# Altium PCB QT7_Xplained_Pro.PcbDoc
Units mm, origin at the board's own origin, x right, y up, seen from the top; angles counter-clockwise.
Board outline 106.52 x 32 mm, 2 copper layers (Top Layer, Bottom Layer); 44 components, 32 nets, 134 pads, 32 vias.
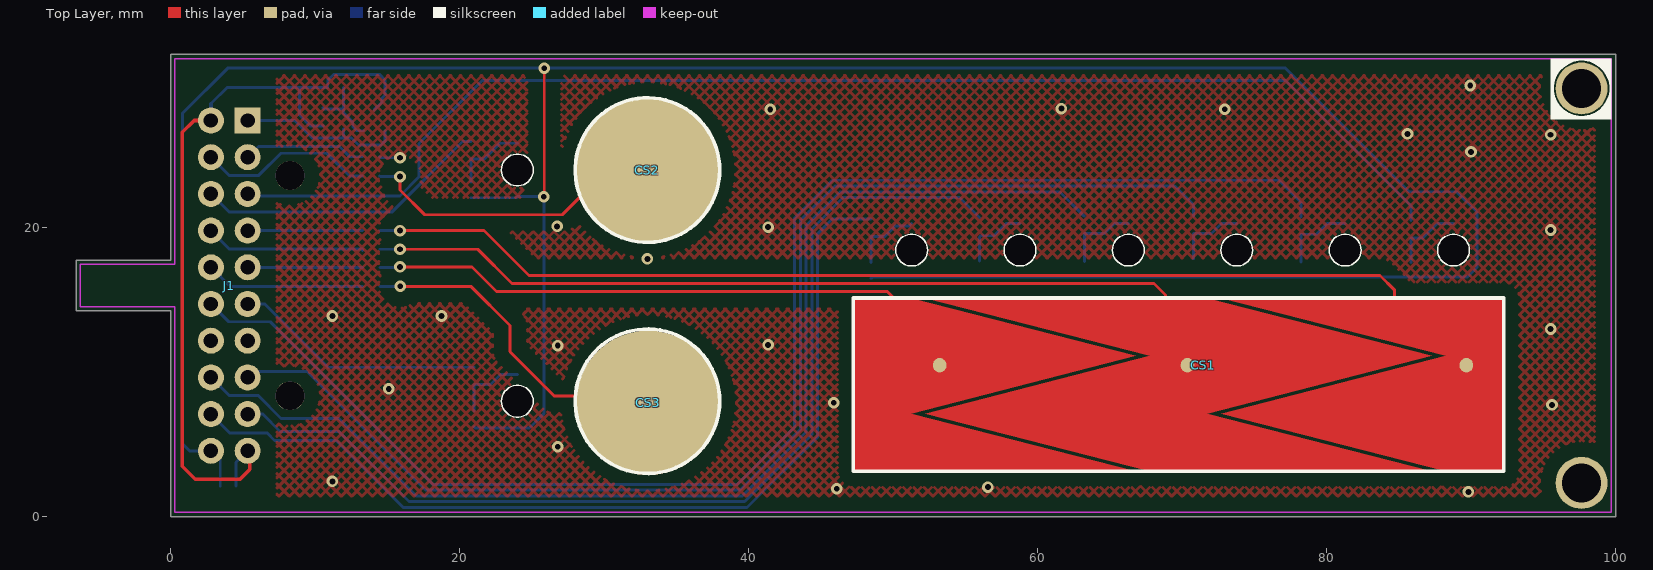
[diagram p0: Top Layer view]
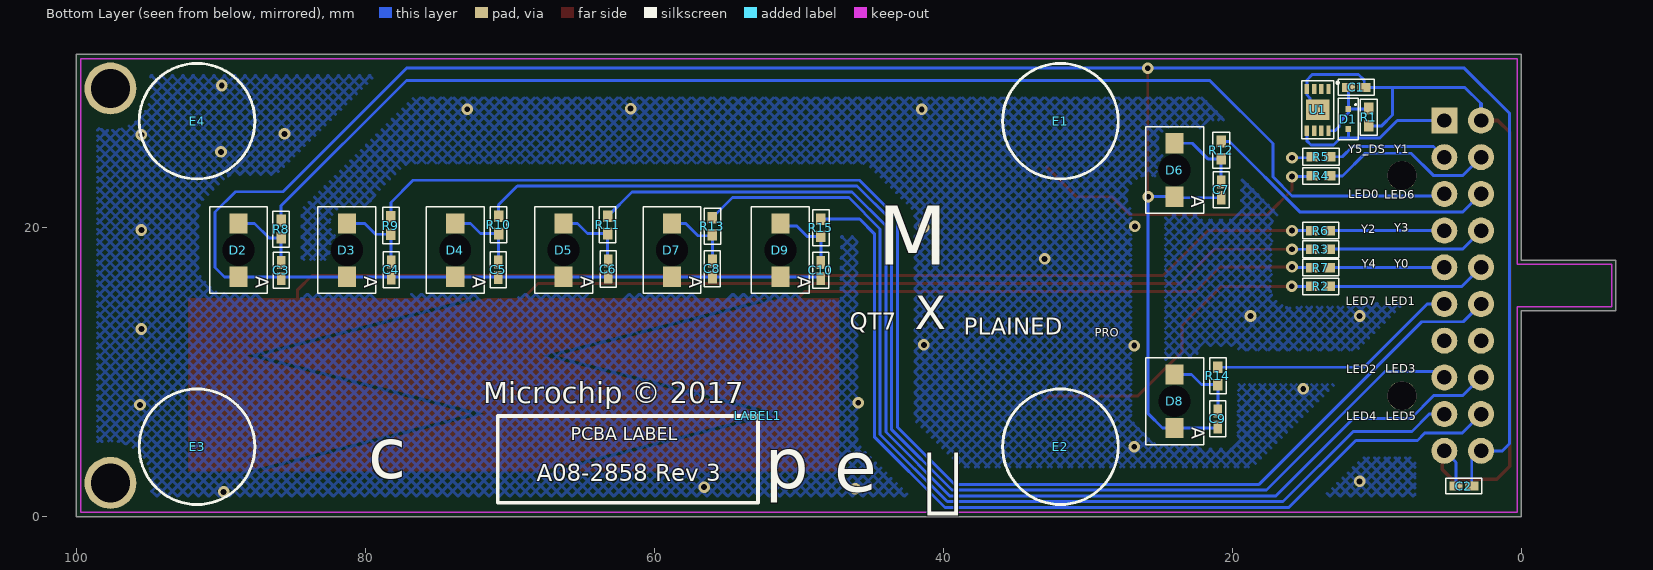
[diagram p1: Bottom Layer view, seen from below]

## Layer stack, top to bottom
Top Solder: solder mask 0.0102, Solder Resist, Dk 3.5
Top Layer: signal copper 0.0356
Dielectric 1: dielectric 0.32, FR-4, Dk 4.8
Bottom Layer: signal copper 0.0356
Bottom Solder: solder mask 0.0102, Solder Resist, Dk 3.5

## Board outline
-6.515,14.248 -6.515,17.748 0,17.748 0,32 100,32 100,0 0,0 0,14.248

## Design rules (kind name [scope] priority, off if disabled: settings)
Clearance Clearance_LED [InComponent('D2')  or   InComponent('D3') or InComponent('D4') or InComponent('D5') or InComponent('D6') or InComponent('D7') or InComponent('D8')or InComponent('D9')] p1: gap=0.05
Clearance Clearance_Poly [InPoly] p2: gap=1
Clearance [All] p3: gap=0.2
HoleSize [All] p1: absolutevalues=TRUE maxlimit=10 minlimit=0.025 maxpercent=80.000 minpercent=20.000
MinimumSolderMaskSliver [All] p1: minsoldermaskwidth=0.1
PlaneConnect [All] p1: planeconnectstyle=Direct reliefexpansion=0.508 reliefentries=4 reliefconductorwidth=0.254 reliefairgap=0.254
PolygonConnect [All] p1: connectstyle=Direct reliefconductorwidth=0.254 reliefentries=4 polygonreliefangle="90 Angle" airgapwidth=0.254
RoutingVias [All] p1: holewidth=0.4 width=0.8 viastyle="Through Hole" minholewidth=0.4 minwidth=0.8 maxholewidth=0.4 maxwidth=0.8
SilkToSilkClearance SilkToSilkClearance_Text [IsText vs IsText] p1: silktosilkclearance=0
SilkToSilkClearance [All] p2: silktosilkclearance=0.1
SilkToSolderMaskClearance [IsPad] p1: minsilkscreentomaskgap=0.1 clearancetoexposedcopper=TRUE
SolderMaskExpansion [All] p1: expansion=0.05
Width [All] p1: maxlimit=0.254 minlimit=0.2 preferedwidth=0.2
25 further rules are at their usual default settings.

## Classes and differential pairs
component class QT7_Xplained_Pro: C1 C2 C3 C4 C5 C6 C7 C8 C9 C10 CS1 CS3 D1 D2 D3 D4 D5 D6 D7 D8 D9 E3 E4 J1 LABEL1 R1 R2 R3 R4 R5 R6 R7 R8 R9 R10 R11 R12 R13 R14 R15 U1

## Components (designator, comment, footprint, x,y, rotation, side; value= is the part's Value field where it differs from the comment)
C1 "Recommended by Escatec. No datasheet available yet." AP1-00001 11.43,29.716 r180 bottom
C2 "Recommended by Escatec. No datasheet available yet." AP1-00001 3.988,2.132 r0 bottom
C3 "CAP-NONPOL" AP1-00001 85.835,17.057 r90 bottom
C4 "CAP-NONPOL" AP1-00001 78.224,17.092 r90 bottom
C5 "CAP-NONPOL" AP1-00001 70.8,17.098 r90 bottom
C6 "CAP-NONPOL" AP1-00001 63.2,17.148 r90 bottom
C7 "CAP-NONPOL" AP1-00001 20.777,22.631 r90 bottom
C8 "CAP-NONPOL" AP1-00001 55.985,17.157 r90 bottom
C9 "CAP-NONPOL" AP1-00001 21.006,6.782 r90 bottom
C10 "CAP-NONPOL" AP1-00001 48.485,17.057 r90 bottom
CS1 "Medium QTouch Slider" Selfcap_Slider 71.45,10.49 r0 top
CS2 "QTouch Button" PCBComponent_1#1 33,24 r0 top
CS3 "QTouch Button" PCBComponent_1#2 33,8 r0 top
D1 "Farnell# 1615809" AP4-00036 11.979,27.531 r270 bottom
D2 "LED_21" AP4-00034 88.785,18.457 r270 bottom
D3 "LED_21" AP4-00034 81.285,18.457 r270 bottom
D4 "LED_21" AP4-00034 73.785,18.457 r270 bottom
D5 "LED_21" AP4-00034 66.285,18.457 r270 bottom
D6 "LED_21" AP4-00034 24,24 r270 bottom
D7 "LED_21" AP4-00034 58.785,18.457 r270 bottom
D8 "LED_21" AP4-00034 24,8 r270 bottom
D9 "LED_21" AP4-00034 51.285,18.457 r270 bottom
E1 "" AP8-00192 31.902,27.38 r0 bottom
E2 "" AP8-00192 31.902,4.85 r0 bottom
E3 "" AP8-00192 91.655,4.85 r0 bottom
E4 "" AP8-00192 91.655,27.38 r0 bottom
J1 "" AP8-00621 4.064,15.998 r90 top locked
LABEL1 "" AP8-00317 52.836,6.98 r0 bottom
R1 "R2" AP2-00000 10.566,27.659 r90 bottom
R2 "R2" AP2-00000 13.894,15.951 r180 bottom
R3 "R2" AP2-00000 13.894,18.515 r180 bottom
R4 "R2" AP2-00000 13.868,23.595 r180 bottom
R5 "R2" AP2-00000 13.868,24.915 r180 bottom
R6 "R2" AP2-00000 13.894,19.81 r180 bottom
R7 "R2" AP2-00000 13.894,17.245 r180 bottom
R8 "R2" AP2-00000 85.835,19.907 r270 bottom
R9 "R2" AP2-00000 78.235,20.157 r270 bottom
R10 "R2" AP2-00000 70.785,20.207 r270 bottom
R11 "R2" AP2-00000 63.235,20.207 r270 bottom
R12 "R2" AP2-00000 20.777,25.375 r270 bottom
R13 "R2" AP2-00000 55.985,20.107 r270 bottom
R14 "R2" AP2-00000 21.006,9.754 r270 bottom
R15 "R2" AP2-00000 48.485,20.007 r270 bottom
U1 "ATSHA204A-SWI" AP6-00409 14.097,28.167 r270 bottom

## Footprints (in the part's own frame and the unit in brackets; to place one, negate y for a bottom-side part, rotate by r counter-clockwise, add the part's x,y. Pads: shape width x height; smd on the part's side, far side on the other; paste and mask are expansions set on the pad)
AP1-00001 [mm] "Standard 0402 SMD capacitor footprint"
  rect 0.9x0.6 smd: 1(-0.55,0) 2(0.55,0)
  silkscreen extent -1.25,-0.55 1.25,0.55, body extent -0.5,-0.3 0.5,0.3, height 0.2
AP2-00000 [mm] "Standard 0402 SMD resistor footprint"
  rect 0.8x0.65 smd: 1(-0.6,0) 2(0.6,0)
  silkscreen extent -1.25,-0.58 1.25,0.58, body extent -0.5,-0.3 0.5,0.3, height 0.2
AP4-00034 [mm] "Reverse mount SMD LED"
  round 0 hole 2.2 unplated mask+1.15: 0(0,0)
  rect 1.4x1.25 smd: 1(1.85,0) 2(-1.85,0)
  silkscreen extent -3,-2 3,2, body extent -2,-1 2,1, height 0.3
AP4-00036 [mm] "Molded Diode, 2-Leads, Body 1,2x0,8mm, IPC Medium Density"
  rect 0.4x0.4 smd: 1(-0.7,0) 2(0.7,0)
  silkscreen extent -1.43,-0.7 1.43,0.7, body extent -0.8,-0.4 0.8,0.4, height 0.7
AP6-00409 [mm]
  rect 0.7x0.3 smd mask+0.075: 1(-1.45,0.75) 2(-1.45,0.25) 3(-1.45,-0.25) 4(-1.45,-0.75) 5(1.45,-0.75) 6(1.45,-0.25) 7(1.45,0.25) 8(1.45,0.75)
  rect 1.4x1.6 smd paste-0.025 mask+0.075: 9(0,0)
  silkscreen extent -2,-1.1 2,1.45, body extent -1.55,-1.05 1.55,1.05, height 0.6
AP8-00192 [mm]
  silkscreen extent -4,-4 4,4, body extent -4,-4 4,4, height 2.79
AP8-00317 [mm] "Placement area for 18x6mm sticker"
  silkscreen extent 0,0 18,6
AP8-00621 [mm] "2x5 Receptacle THM, Right Angle. No Guide. 2.54mm pitch. Length 13.2mm, width 5.0mm, height 5mm"
  rect 1.8x1.8 hole 1: 1(11.43,-1.27)
  rect 2.1x2.1 on Top Paste: 1(11.43,-1.27) 2(11.43,1.27) 3(8.89,-1.27) 4(8.89,1.27) 5(6.35,-1.27) 6(6.35,1.27) 7(3.81,-1.27) 8(3.81,1.27) 9(1.27,-1.27) 10(1.27,1.27) 11(-1.27,-1.27) 12(-1.27,1.27) 13(-3.81,-1.27) 14(-3.81,1.27) 15(-6.35,-1.27) 16(-6.35,1.27) 17(-8.89,-1.27) 18(-8.89,1.27) 19(-11.43,-1.27) 20(-11.43,1.27)
  round 1.8 hole 1: 2(11.43,1.27) 3(8.89,-1.27) 4(8.89,1.27) 5(6.35,-1.27) 6(6.35,1.27) 7(3.81,-1.27) 8(3.81,1.27) 9(1.27,-1.27) 10(1.27,1.27) 11(-1.27,-1.27) 12(-1.27,1.27) 13(-3.81,-1.27) 14(-3.81,1.27) 15(-6.35,-1.27) 16(-6.35,1.27) 17(-8.89,-1.27) 18(-8.89,1.27) 19(-11.43,-1.27) 20(-11.43,1.27)
  body extent -12.95,-1.47 12.95,11.3, height 4.98
PCBComponent_1#1 [mm]
  round 10 smd: 1(0,0)
  silkscreen extent -5,-5 5,5
PCBComponent_1#2 [mm]
  round 10 smd: 1(0.05,-0.1)
  silkscreen extent -5,-5 5,5
Selfcap_Slider [mm] "Selfcap_Slider without wrapround"
  oval 0.95x1 smd: 1(-18.224,0) 2(-1.079,0) 3(18.224,0)
  Top Layer region: 16.941,-7.352 16.801,-7.352 1.259,-3.352 16.801,0.648 1.259,4.648 16.802,4.648 20.801,4.648 20.801,-7.352
  Top Layer region: -20.338,4.648 -20.199,4.648 -4.657,0.648 -20.199,-3.352 -4.657,-7.352 -20.199,-7.352 -24.198,-7.352 -24.199,4.648
  Top Layer region: -3.699,-6.975 -3.699,-7.352 -19.241,-3.352 -3.699,0.648 -19.241,4.648 -3.699,4.648 -3.699,0.648
  Top Layer region: 0.302,4.271 0.302,4.648 15.843,0.648 0.302,-3.352 15.843,-7.352 0.301,-7.352 0.301,-3.352
  Top Layer region: -3.699,4.648 0.301,4.648 0.301,-1.352 0.301,-7.352 -3.699,-7.352

## Part data
C1 C2: library part A01-0347, "Ceramic capacitor, SMD 0402, X5R, 6.3V, +/-20% (de33687)"
C3 C4 C5 C6 C7 C8 C9 C10: library part A01-0038, "Ceramic capacitor, SMD 0402, X7R, 50V, +/-10%"
CS1: library part MediumQTouchSlider
CS2 CS3: library part QTouchButton
D1: library part A04-0049, "Schottky diode, If:200mA, Vf:0.35V, Vrrm:30V, SOD-523"
D2 D3 D4 D5 D6 D7 D8 D9: library part A10-0148, "Reverse mount SMD White LED 180-450mcd@20mA"
E1 E2 E3 E4: library part A08-0053, "2.8mm adhesive feet,diam 8.0mm"
J1: library part A08-1512, "2x10, female pin header receptable, right-angled, 2.54mm pitch, THM, Pin In Paste"
LABEL1: library part A09-0611, "PCBA identification label PP Top White Gloss"
R1: library part A02-0260, "Thick film resistor, SMD 0402, 1/16W, 1%"
R2 R3 R4 R5 R6 R7: library part A02-0212, "Thick film resistor, SMD 0402, 1/16W, 1%"
R8 R9 R10 R11 R12 R13 R14 R15: library part A02-0200, "Thick film resistor, SMD 0402, 1/16W, 1%"
U1: library part A06-1276, "ATSHA204 with 1-wire interface and UDFN8 package"

## Free pads (board coordinates)
  round 2 hole 2 unplated: 2(8.264,23.618) 3(8.264,8.378)
  round 3.6 hole 2.7 paste-2.6: 666(97.65,2.35) 666(97.65,29.65)

## Via types
v1: diameter 0.8, hole 0.4, Top Layer to Bottom Layer, tented both sides, 32 vias

## Nets (pads, with @x,y where several pads share a name; then routed paths per layer and width w, separated by ;. In a path a pad name is that pad's centre, name@x,y a point inside that pad or via, vN(x,y) a via of type N, cw(c..) or ccw(c..) an arc to the next point about the centre after c; other vN are vias at no path point)
DRIVEN_SHIELD: R5.1 | length 1.4
  Bottom Layer w0.2: R5.1 14.535,24.848 v1@15.8,24.848
  other v1: 89.814,1.723 46.1,1.95 56.563,2.062 11.2,2.448 26.8,4.848 95.6,7.748 45.9,7.9 15.1,8.848 26.8,11.848 41.35,11.898 95.5,12.998 11.2,13.898 18.75,13.898 33,17.85 95.5,19.848 41.35,20.048 26.75,20.098 15.879,24.848 89.995,25.25 95.5,26.448 85.6,26.5 41.5,28.198 72.95,28.2 61.65,28.248 89.95,29.848
GND: C1.2 C2.2 J1.2@2.794,27.428 J1.19@5.334,4.568 R1.1 U1.4 U1.9 | length 56
  Top Layer w0.254: J1.2@2.794,27.428 1.63,27.428 0.813,26.611 0.813,3.502 1.716,2.598 4.8,2.598 5.483,3.282 5.483,4.419 J1.19@5.334,4.568
  Bottom Layer w0.2: 2.794,28.594 3.916,29.716 8.915,29.716 ; C2.2 4.538,3.772 5.334,4.568 J1.19@5.579,4.323 ; R1.1 9.668,27.059 8.915,27.811 8.915,29.716 ; U1.9 14.621,28.691 14.621,28.967 14.847,29.192 U1.4 14.847,30.236 14.478,30.605 11.278,30.605 10.88,30.207 C1.2 8.915,29.716
  Bottom Layer w0.254: J1.2@2.794,27.428 2.794,28.594
ID_DATA: D1.2 J1.1@5.334,27.428 U1.5 | length 11.7
  Bottom Layer w0.2: J1.1@5.334,27.428 8.589,27.428 9.804,26.213 11.979,26.213 ; D1.2 11.979,26.213 ; U1.5@14.851,26.717 14.851,26.025 14.554,25.728 13.005,25.728 12.52,26.213 11.979,26.213
LED_0: J1.5@5.334,22.348 R8.1 | length 89.8
  Bottom Layer w0.2: J1.5@5.334,22.348 5.483,22.2 15.868,22.2 17.2,23.531 17.2,25.83 21.57,30.2 77.163,30.2 85.835,21.528 R8.1
LED_1: J1.12@2.794,14.728 R9.1 | length 99.4
  Bottom Layer w0.2: J1.12@2.794,14.728 4.024,13.498 6.9,13.498 18.148,2.25 39.233,2.25 43.181,6.198 43.181,20.662 45.808,23.29 76.707,23.29 78.235,21.762 R9.1
LED_2: J1.15@5.334,9.648 R10.1 | length 87.5
  Bottom Layer w0.2: J1.15@5.334,9.648 5.74,10.054 9.444,10.054 17.648,1.85 39.399,1.85 43.581,6.032 43.581,20.497 45.974,22.89 69.487,22.89 70.785,21.592 R10.1
LED_3: J1.16@2.794,9.648 R11.1 | length 81.6
  Bottom Layer w0.2: J1.16@2.794,9.648 4.035,8.407 6.045,8.407 7.645,6.807 11.641,6.807 16.998,1.45 39.564,1.45 43.981,5.867 43.981,20.141 46.33,22.49 61.552,22.49 R11.1
LED_4: J1.17@5.334,7.108 R13.1 | length 70.8
  Bottom Layer w0.2: J1.17@5.334,7.108 6.379,7.108 7.575,5.912 11.636,5.912 16.498,1.05 39.73,1.05 44.381,5.701 44.381,19.929 46.541,22.09 54.602,22.09 R13.1
LED_5: J1.18@2.794,7.108 R15.1 | length 64.9
  Bottom Layer w0.2: J1.18@2.794,7.108 4.113,5.789 6.701,5.789 7.202,5.288 11.46,5.288 16.098,0.65 39.896,0.65 44.781,5.535 44.781,19.592 45.796,20.607 R15.1
LED_6: J1.6@2.794,22.348 R12.1 | length 20.5
  Bottom Layer w0.2: J1.6@2.794,22.348 4.035,21.107 15.342,21.107 20.209,25.975 R12.1
LED_7: J1.11@5.334,14.728 R14.1 | length 17.5
  Bottom Layer w0.2: J1.11@5.334,14.728 6.52,14.728 10.895,10.354 R14.1
NetC1_1: C1.1 D1.1 R1.2 U1.8 | length 5.3
  Bottom Layer w0.2: R1.2@10.557,28.309 R1.2@10.566,28.309 ; R1.2 10.594,28.231 D1.1 ; C1.1@11.979,29.715 D1.1 ; U1.8 12.905,26.717 12.606,27.016 12.606,27.303 11.979,27.929 D1.1
NetC3_2: C3.2 D2.2 R8.2 | length 5.1
  Bottom Layer w0.2: C3.2 R8.2 86.668,19.307 87.668,20.307 D2.2
NetC4_2: C4.2 D3.2 R9.2 | length 5.3
  Bottom Layer w0.2: C4.2 78.224,19.546 R9.2 79.298,19.557 80.048,20.307 D3.2
NetC5_2: C5.2 D4.2 R10.2 | length 5
  Bottom Layer w0.2: C5.2@70.785,17.857 R10.2 72.032,19.607 72.732,20.307 D4.2
NetC6_2: C6.2 D5.2 R11.2 | length 5.3
  Bottom Layer w0.2: C6.2@63.235,17.657 R11.2 ; R11.2@63.235,19.599 64.622,19.599 65.33,20.307 D5.2
NetC7_2: C7.2 D6.2 R12.2 | length 5.3
  Bottom Layer w0.2: C7.2 R12.2 21.701,24.775 22.777,25.85 D6.2
NetC8_2: C8.2 D7.2 R13.2 | length 4.8
  Bottom Layer w0.2: C8.2 55.985,19.366 56.073,19.454 56.977,19.454 57.83,20.307 D7.2
NetC9_2: C9.2 D8.2 R14.2 | length 5.1
  Bottom Layer w0.2: C9.2 R14.2 22.133,9.154 22.829,9.85 D8.2
NetC10_2: C10.2 D9.2 R15.2 | length 5
  Bottom Layer w0.2: C10.2 R15.2 49.43,19.407 50.137,20.115 51.093,20.115 D9.2
VCC_TARGET: C2.1 C3.1 C4.1 C5.1 C6.1 C7.1 C8.1 C9.1 C10.1 D2.1 D3.1 D4.1 D5.1 D6.1 D7.1 D8.1 D9.1 J1.20@2.794,4.568 | length 203.1
  Top Layer w0.2: v1(25.832,22.156) 25.857,22.182 v1(25.857,31.039)
  Bottom Layer w0.2: C2.1 3.438,3.925 2.794,4.568 1.318,4.568 0.813,5.074 0.813,27.911 3.952,31.05 77.15,31.05 85.7,22.5 89,22.5 90.4,21.1 90.4,17.245 89.762,16.607 D2.1 D3.1 D4.1 D5.1 D7.1 D9.1 48.585,16.607 C10.1 ; C7.1 23.931,22.081 D6.1 24.006,22.156 v1(25.832,22.156) 25.832,7.137 24.844,6.15 D8.1 21.088,6.15 C9.1
Y-LINE-0: CS3.1 R2.1 | length 22.8
  Top Layer w0.2: v1(15.9,15.951) 20.776,15.951 23.496,13.231 23.496,11.429 26.575,8.35 32.75,8.35 CS3.1@33,8.1
  Bottom Layer w0.2: R2.1 v1(15.9,15.951)
Y-LINE-0_CON: J1.10@2.794,17.268 R2.2 | length 11
  Bottom Layer w0.2: J1.10@2.794,17.268 4.111,15.951 R2.2
Y-LINE-1: CS2.1 R4.1 | length 21.4
  Top Layer w0.2: v1(15.879,23.544) 15.879,22.619 17.594,20.904 27.102,20.904 28.348,22.15 30.797,22.15 CS2.1@32.85,24.203
  Bottom Layer w0.2: R4.1 14.519,23.544 v1(15.879,23.544)
Y-LINE-1_CON: J1.4@2.794,24.888 R4.2 | length 12.3
  Bottom Layer w0.2: J1.4@2.794,24.888 4.048,23.634 6.108,23.634 7.633,25.159 10.807,25.159 12.372,23.595 R4.2
Y-LINE-2: CS1.3 R6.1 | length 73.1
  Top Layer w0.2: v1(15.879,19.81) 21.694,19.81 24.804,16.7 83.708,16.7 84.69,15.718 84.69,14.53
  Bottom Layer w0.2: R6.1 v1(15.879,19.81)
Y-LINE-2_CON: J1.7@5.334,19.808 R6.2 | length 13.8
  Bottom Layer w0.2: J1.7@5.334,19.808 5.336,19.81 6.428,19.81 ; 12.216,19.808 6.426,19.808 6.428,19.81 ; R6.2 6.428,19.81
Y-LINE-3: CS1.2 R3.1 | length 56.7
  Top Layer w0.2: v1@15.845,18.515 21.26,18.515 23.625,16.15 68.05,16.15 68.85,15.35 68.85,14.35
  Bottom Layer w0.2: R3.1 v1@15.845,18.515
  other v1: 15.879,18.515
Y-LINE-3_CON: J1.8@2.794,19.808 R3.2 | length 11.1
  Bottom Layer w0.2: J1.8@2.794,19.808 4.08,18.522 13.294,18.522 R3.2@13.294,18.438
Y-LINE-4: CS1.1 R7.1 | length 37.2
  Top Layer w0.2: v1@15.622,17.295 20.854,17.295 22.549,15.6 49.6,15.6 49.942,15.258 49.942,14.4
  Bottom Layer w0.2: R7.1 15.571,17.245 v1@15.622,17.295
  other v1: 15.879,17.295
Y-LINE-4_CON: J1.9@5.334,17.268 R7.2 | length 8
  Bottom Layer w0.2: J1.9@5.334,17.268 5.358,17.245 R7.2
Y-LINE-5_CON: J1.3@5.334,24.888 R5.2 | length 8.5
  Bottom Layer w0.2: J1.3@5.334,24.888 6.074,25.629 11.684,25.629 12.397,24.915 R5.2
pads on no net: D2.0 D3.0 D4.0 D5.0 D6.0 D7.0 D8.0 D9.0 J1.1@5.334,27.428 J1.2@2.794,27.428 J1.3@5.334,24.888 J1.4@2.794,24.888 J1.5@5.334,22.348 J1.6@2.794,22.348 J1.7@5.334,19.808 J1.8@2.794,19.808 J1.9@5.334,17.268 J1.10@2.794,17.268 J1.11@5.334,14.728 J1.12@2.794,14.728 J1.13 J1.14 J1.15@5.334,9.648 J1.16@2.794,9.648 J1.17@5.334,7.108 J1.18@2.794,7.108 J1.19@5.334,4.568 J1.20@2.794,4.568 U1.1 U1.2 U1.3 U1.6 U1.7

## Polygon pours and split planes (outlines as drawn)
DRIVEN_SHIELD on Top Layer "DRIVEN_SHIELD_L01_P002" (hatched 45Degree grid 0.508 track 0.203, remove dead copper, pour order 4): 0,0 100,0 100,32 0,32
DRIVEN_SHIELD on Bottom Layer "DRIVEN_SHIELD_L01_P002" (hatched 45Degree grid 0.508 track 0.203, remove dead copper, pour order 2): 0,0 100,0 100,32 0,32
no net on Top Overlay "Top Overlay-No Net" (solid): 95.5,31.7 99.7,31.7 99.7,27.5 95.5,27.5

## Keep-outs
Keep-Out Layer:
  lines w0.1: 0.3,0.305 0.3,14.523 -6.24,14.523 -6.24,17.473 0.3,17.473 0.3,31.7 99.695,31.7 ; 0.305,0.3 99.7,0.3 99.7,31.7

## Other copper
Top Layer:
  pour cut-out: 0.861,0.861 0.873,0.848 7.35,0.861 7.35,31.139 6.991,31.139 0.861,31.139
Bottom Layer:
  pour cut-out: 0.861,0.861 0.873,0.848 7.35,0.861 7.35,31.139 6.991,31.139 0.861,31.139

## Silkscreen, mask and mechanical layers (free items; w line width, h text height)
Top Overlay:
  circle w0.1: c66.285,18.457 r1.1
  circle w0.1: c73.785,18.457 r1.1
  circle w0.1: c51.285,18.457 r1.1
  circle w0.1: c58.785,18.457 r1.1
  circle w0.1: c81.285,18.457 r1.1
  circle w0.1: c88.785,18.457 r1.1
  circle w0.1: c24,24 r1.1
  circle w0.1: c24,8 r1.1
  pour cut-out: 95.75,29.65 ccw(c97.65,29.65) 97.65,27.75 ccw(c97.65,29.65) 99.55,29.65 ccw(c97.65,29.65) 97.65,31.55 ccw(c97.65,29.65)
  lines w0.1: 92.24,3.15 92.251,3.161 ; 92.251,15.138 92.251,15.138
  lines w0.254: 92.24,3.15 47.263,3.15 47.251,3.161 47.251,15.138 92.251,15.138 92.251,3.161
Bottom Overlay:
  text "Y1" at 8.788,24.943 h1
  text "Y5_DS" at 11.989,24.943 h1
  text "LED0" at 11.989,21.844 h1
  text "LED6" at 9.5,21.819 h1
  text "Y3" at 8.814,19.507 h1
  text "Y2" at 11.074,19.431 h1
  text "Y4" at 11.049,17.043 h1
  text "Y0" at 8.814,17.018 h1
  text "M" at 44.53,16.086 h7
  text "LED1" at 9.474,14.427 h1
  text "LED7" at 12.167,14.427 h1
  text "QT7" at 46.48,12.566 h2
  text "PRO" at 29.525,12.241 h1
  text "PLAINED" at 38.59,12.226 h2
  text "X" at 41.99,12.226 h4
  text "LED3" at 9.423,9.748 h1
  text "LED2" at 12.116,9.728 h1
  text "Microchip © 2017" at 71.831,7.391 h2.5
  text "LED4" at 12.116,6.477 h1
  text "LED5" at 9.398,6.471 h1
  text "A08-2858 Rev 3" at 68.145,2.083 h2
  text "c" at 79.807,1.524 h6
  text "p" at 52.349,0.838 h6
  text "e" at 47.549,0.61 h6
  text "" at 41.377,-1.803 h10
Mechanical 1:
  lines w0.1: 0,14.233 0,0 100,0 100,32 0,32 0,17.748 -6.515,17.748 -6.515,14.248 0,14.248
Mechanical 6:
  circle w0.254: c97.675,29.6 r1.35

## Text inside footprints (layer, text, board x,y; h text height)
D2: Bottom Overlay "A" at 87.9,16.648 h1.52 r90
D3: Bottom Overlay "A" at 80.4,16.648 h1.52 r90
D4: Bottom Overlay "A" at 72.9,16.648 h1.52 r90
D5: Bottom Overlay "A" at 65.4,16.648 h1.52 r90
D6: Bottom Overlay "A" at 23.151,22.218 h1.52 r90
D7: Bottom Overlay "A" at 57.9,16.648 h1.52 r90
D8: Bottom Overlay "A" at 23.122,6.198 h1.52 r90
D9: Bottom Overlay "A" at 50.4,16.648 h1.52 r90
LABEL1: Bottom Overlay "PCBA LABEL" at 65.807,5 h1.52